# Altium PCB DASH_V_3.PcbDoc
Units mm, origin at the board's own origin, x right, y up, seen from the top; angles counter-clockwise.
Board outline 91 x 62 mm, 2 copper layers (Top Layer, Bottom Layer); 94 components, 86 nets, 304 pads, 58 vias.
Unrouted connection lines stored in the file: 1.
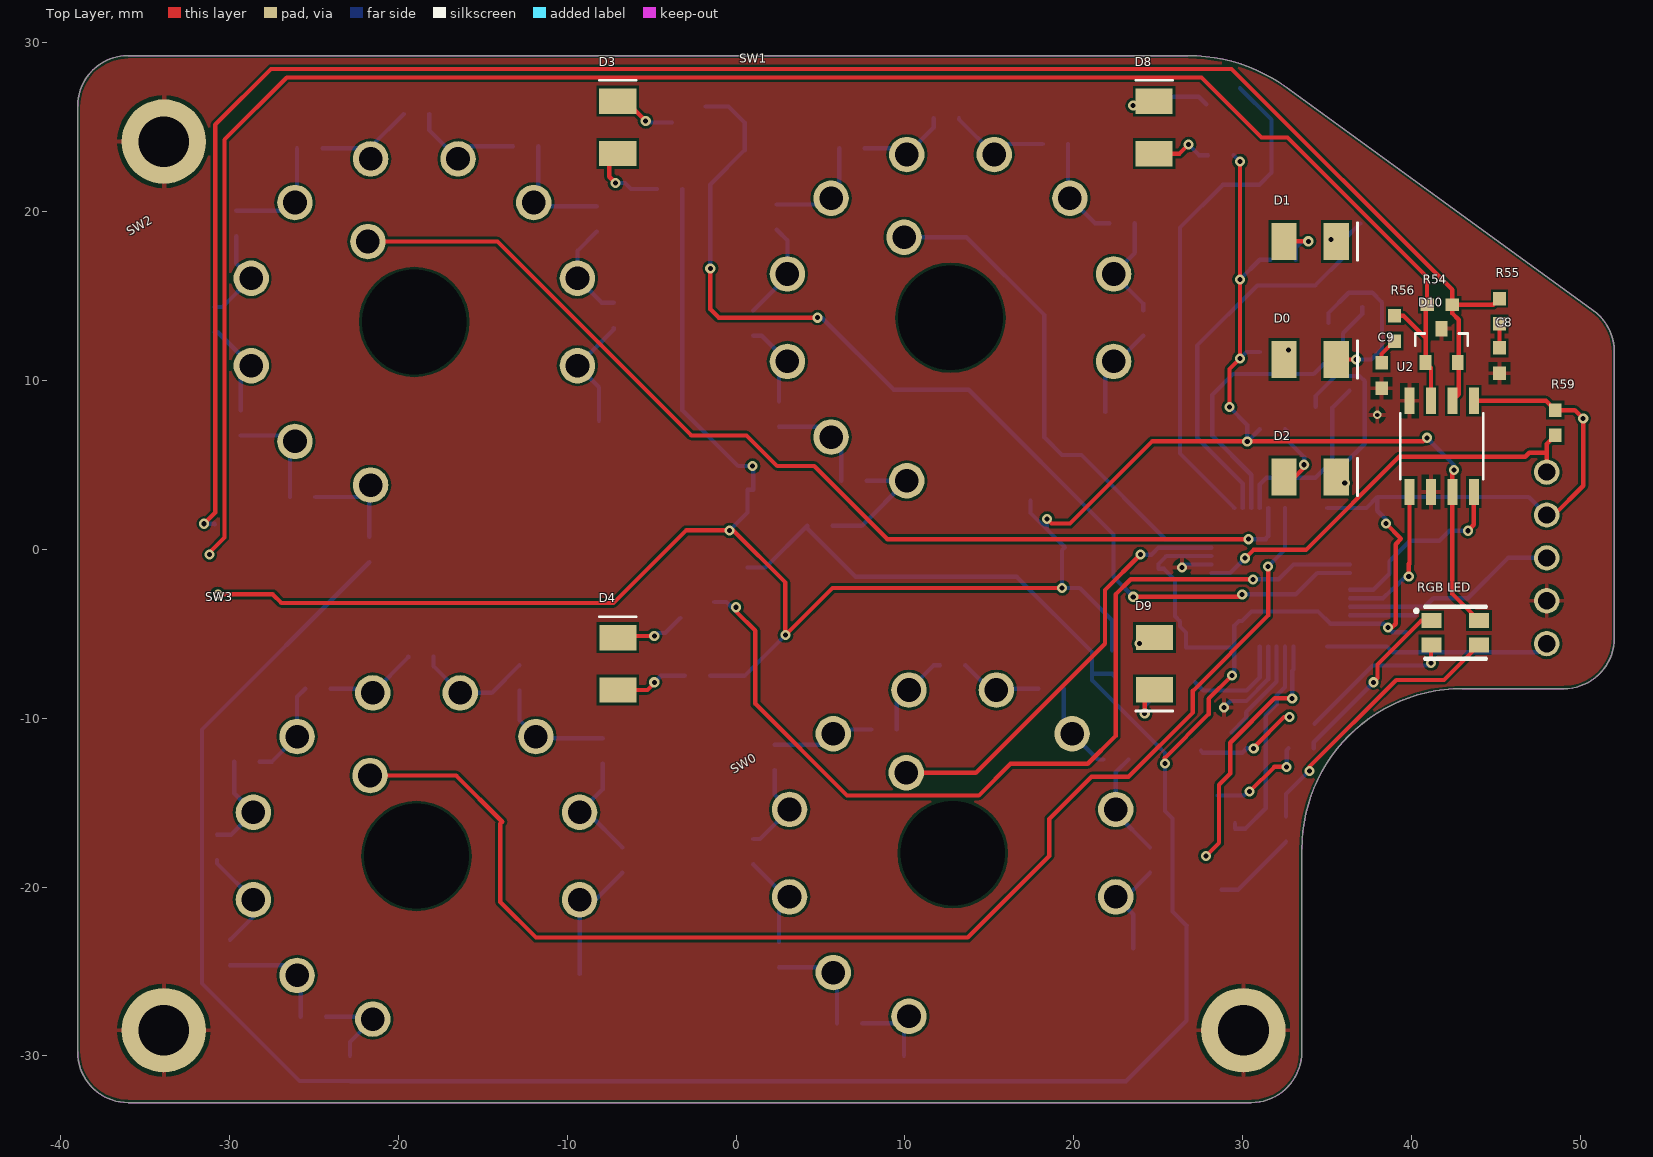
[diagram p0: Top Layer view]
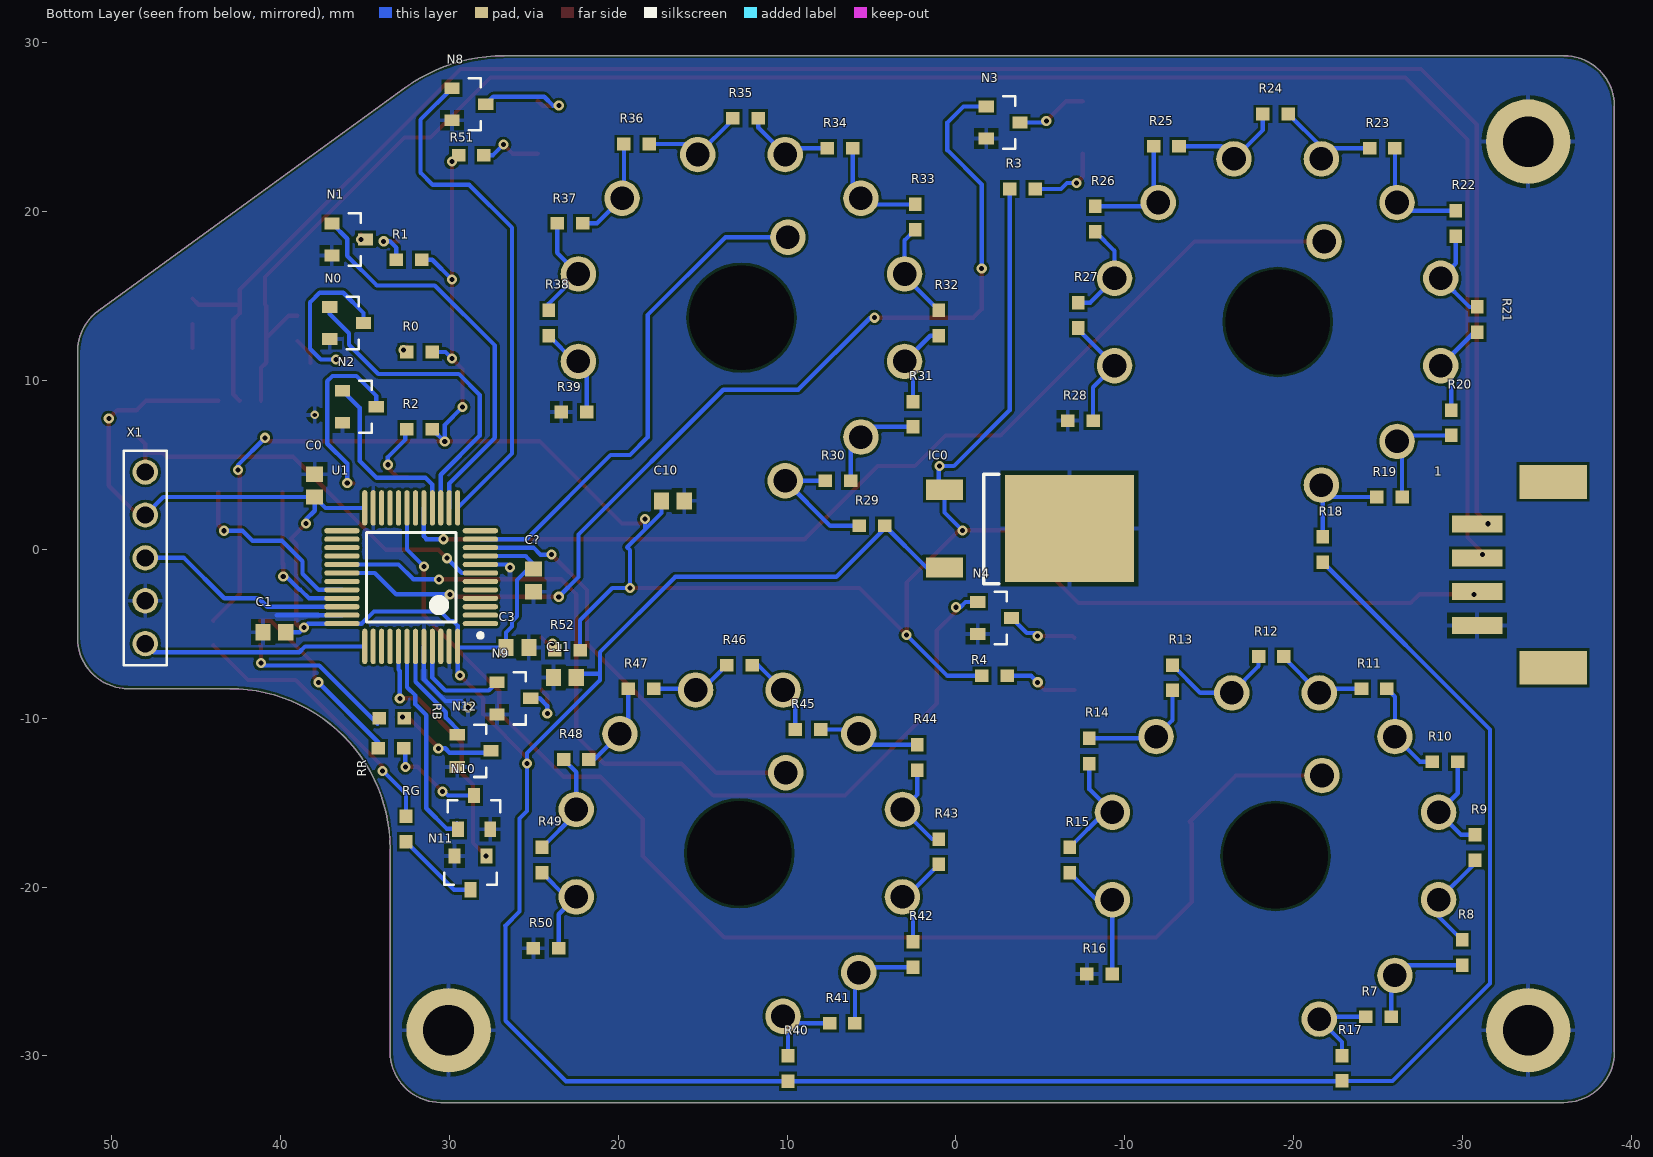
[diagram p1: Bottom Layer view, seen from below]
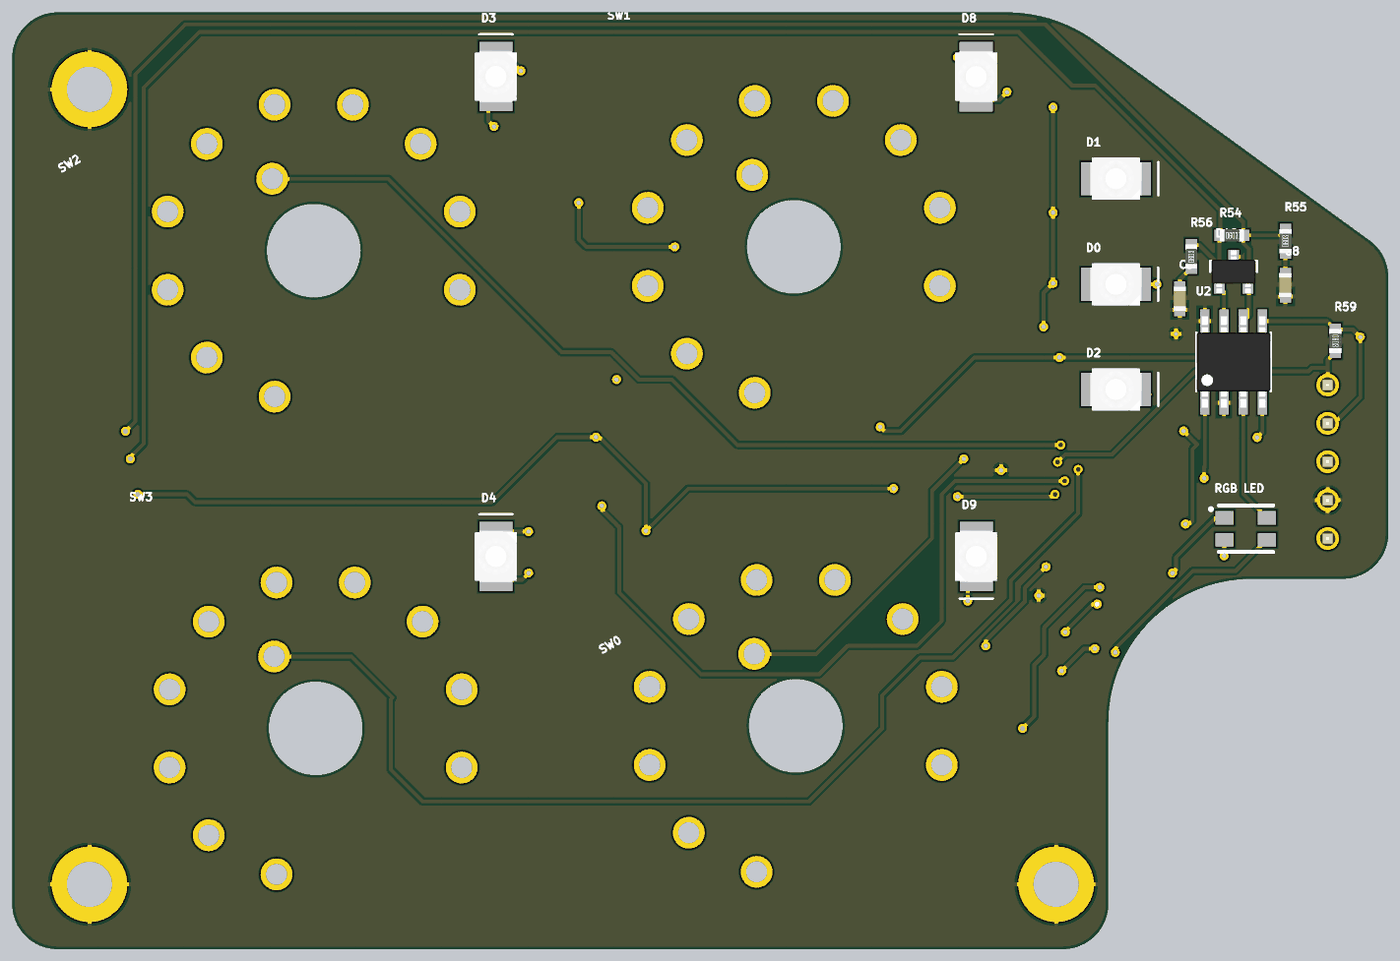
[diagram p2: 3D render of the assembled board from above, using the file's embedded part models]
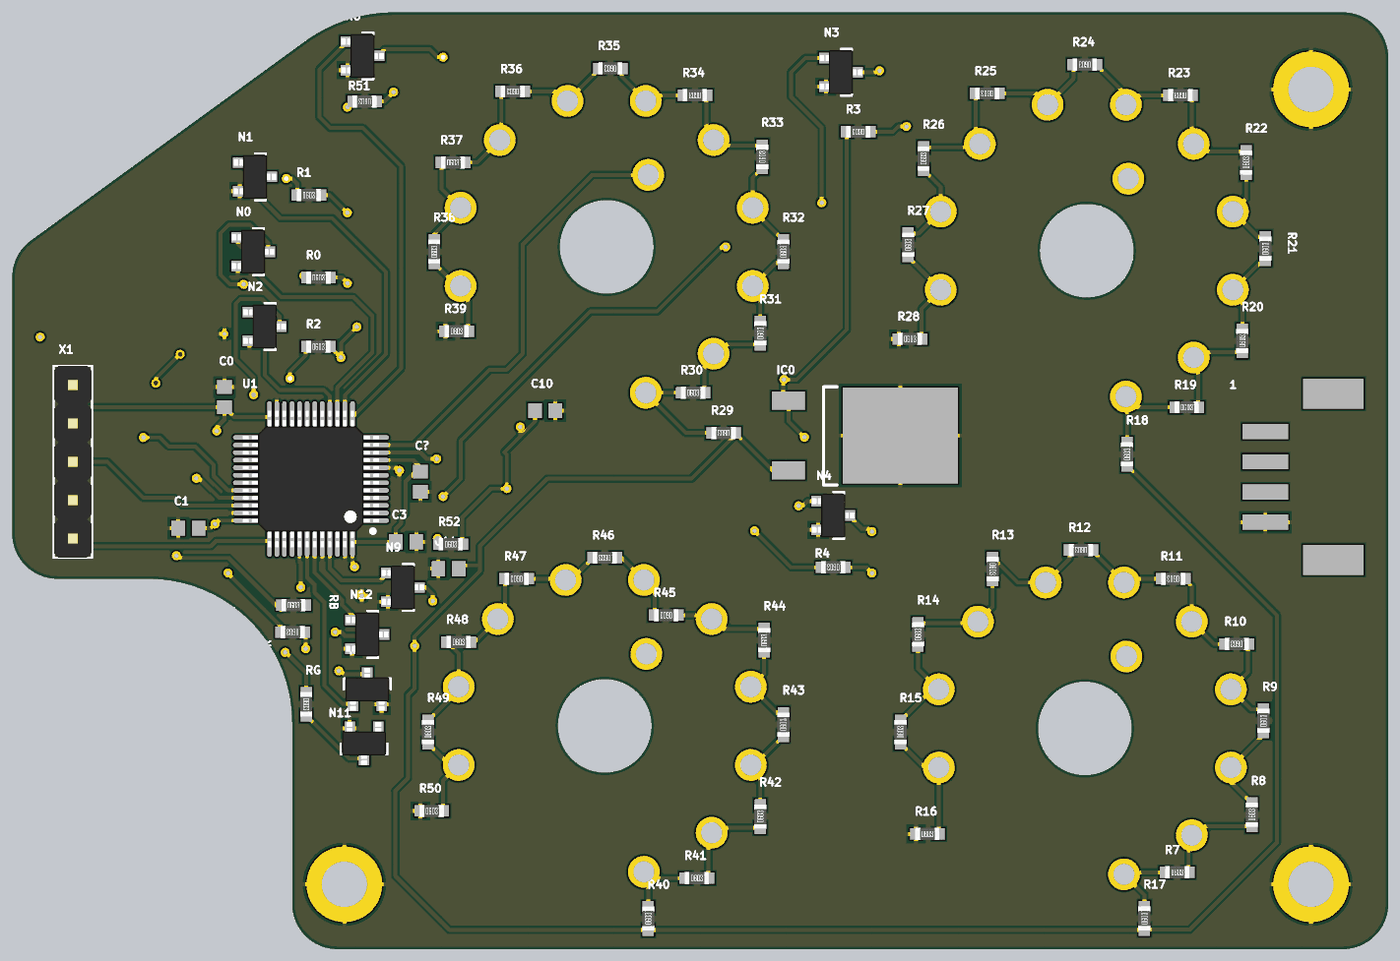
[diagram p3: 3D render of the assembled board from below, using the file's embedded part models]

## Layer stack, top to bottom
Top Solder: solder mask 0.0102, Solder Resist, Dk 3.5
Top Layer: signal copper 0.0356
Dielectric 1: dielectric 0.32, FR-4, Dk 4.8
Bottom Layer: signal copper 0.0356
Bottom Solder: solder mask 0.0102, Solder Resist, Dk 3.5

## Board outline
-38.989,-29.766 ccw(c-35.989,-29.766) -35.989,-32.766 30.499,-32.766 ccw(c30.499,-29.766) 33.499,-29.766 33.499,-17.766 cw(c43.011,-17.766) 43.011,-8.254 49.011,-8.254 ccw(c49.011,-5.254) 52.011,-5.254 52.011,11.706 ccw(c49.011,11.706) 50.776,14.133 32.641,27.321 ccw(c26.759,19.234) 26.759,29.234 -35.989,29.234 ccw(c-35.989,26.234) -38.989,26.234

## Design rules (kind name [scope] priority, off if disabled: settings)
Clearance [All] p1: gap=0.152 ignorepadtopadclearanceinfootprint=FALSE
ComponentClearance [All] p1: gap=0.254 collisioncheckmode=3 verticalgap=0 showdistances=FALSE
PolygonConnect [All] p1: connectstyle=Relief reliefconductorwidth=0.254 reliefentries=4 polygonreliefangle="90 Angle" airgapwidth=0.254
RoutingVias [All] p1: holewidth=15 width=12.7 viastyle="Through Hole" minholewidth=0.3 minwidth=0.6 maxholewidth=0.3 maxwidth=0.6
SolderMaskExpansion [All] p1: expansion=0.102
Width [All] p1: maxlimit=0.254 minlimit=0.254 preferedwidth=0.254
29 further rules are at their usual default settings.

## Classes and differential pairs
component class DASH_V_3_STM_CAN: 1 C0 C1 C3 C8 C9 C? D10 R54 R55 R56 R59 U1 U2 X1
component class DASH_V_3_POTS: R7 R8 R9 R10 R11 R12 R13 R14 R15 R16 R17 R18 R19 R20 R21 R22 R23 R24 R25 R26 R27 R28 R29 R30 R31 R32 R33 R34 R35 R36 R37 R38 R39 R40 R41 R42 R43 R44 R45 R46 R47 R48 R49 R50 SW0 SW1 SW2 SW3
component class DASH_V_3_LEDS_POWER: C10 C11 D0 D1 D2 D3 D4 D8 D9 IC0 N0 N1 N2 N3 N4 N8 N9 N11 N12 R0 R1 R2 R3 R4 R51 R52 RB RG "RGB LED" RR

## Components (designator, comment, footprint, x,y, rotation, side; value= is the part's Value field where it differs from the comment)
1 "Molex 505575-04 4 Position 2.00mm pitch connector wire to board connector Datasheet" 505575-04 -31.361,-1.508 r270 bottom
C0 ".1uf" CAPC1608X87X35NL15T15 37.973,3.77 r270 bottom
C1 ".1uf" CAPC1608X87X35NL15T15 40.359,-4.909 r180 bottom
C3 ".1uf" CAPC1608X87X35NL15T15 25.966,-5.809 r0 bottom
C8 "560p" CAP-0603 45.212,11.176 r90 top
C9 "560p" CAP-0603 38.227,10.287 r90 top
C10 ".33uf" CAPC1608X87X35NL15T15 16.764,2.872 r0 bottom
C11 ".1uf" CAPC1608X87X35NL15T15 23.154,-7.588 r180 bottom
C? ".1uf" CAPC1608X87X35NL15T15 25.019,-1.833 r90 bottom
D0 "LED_XZFBB45S" LED_XZFBB45S 34,11.238 r0 top
D1 "LED_XZFBB45S" LED_XZFBB45S 34,18.229 r0 top
D2 "LED_XZFBB45S" LED_XZFBB45S 34,4.281 r0 top
D3 "LED_XZFBB45S" LED_XZFBB45S -7.002,24.988 r90 top
D4 "LED_XZFBB45S" LED_XZFBB45S -7.001,-6.78 r90 top
D8 "LED_XZFBB45S" LED_XZFBB45S 24.759,24.982 r90 top
D9 "LED_XZFBB45S" LED_XZFBB45S 24.772,-6.775 r270 top
D10 "DIODE-SOT23_PESD1CAN" SOT23 41.783,12.065 r0 top
IC0 "LDO-TO252_L78" TO252 -6.731,1.249 r270 bottom
N0 "NMOS-SOT23" SOT23 36.084,13.396 r270 bottom
N1 "NMOS-SOT23" SOT23 35.957,18.349 r270 bottom
N2 "NMOS-SOT23" SOT23 35.322,8.443 r270 bottom
N3 "NMOS-SOT23" SOT23 -2.794,25.273 r270 bottom
N4 "NMOS-SOT23" SOT23 -2.286,-4.064 r270 bottom
N8 "NMOS-SOT23" SOT23 28.845,26.355 r270 bottom
N9 "NMOS-SOT23" SOT23 26.178,-8.824 r270 bottom
N10 "NMOS-SOT23" SOT23 28.53,-15.573 r180 bottom
N11 "NMOS-SOT23" SOT23 28.748,-19.158 r0 bottom
N12 "NMOS-SOT23" SOT23 28.534,-11.933 r270 bottom
R0 "RES 330" RES-0603 31.758,11.684 r180 bottom
R1 "RES 330" RES-0603 32.397,17.145 r180 bottom
R2 "RES 330" RES-0603 31.762,7.112 r180 bottom
R3 "RES 330" RES-0603 -3.937,21.336 r0 bottom
R4 "RES 330" RES-0603 -2.286,-7.493 r0 bottom
R7 "10K" RES-0603 -25.031,-27.686 r180 bottom
R8 "10K" RES-0603 -29.972,-23.876 r90 bottom
R9 "10K" RES-0603 -30.734,-17.653 r90 bottom
R10 "10K" RES-0603 -28.963,-12.573 r0 bottom
R11 "10K" RES-0603 -24.765,-8.255 r0 bottom
R12 "10K" RES-0603 -18.669,-6.35 r0 bottom
R13 "10K" RES-0603 -12.827,-7.608 r270 bottom
R14 "10K" RES-0603 -7.891,-11.938 r90 bottom
R15 "10K" RES-0603 -6.731,-18.403 r90 bottom
R16 "10K" RES-0603 -8.509,-25.146 r180 bottom
R17 "1K" RES-0603 -22.86,-30.734 r90 bottom
R18 "1K" RES-0603 -21.717,-0.012 r90 bottom
R19 "10K" RES-0603 -25.666,3.095 r180 bottom
R20 "10K" RES-0603 -29.337,7.493 r90 bottom
R21 "10K" RES-0603 -30.861,13.601 r90 bottom
R22 "10K" RES-0603 -29.591,19.292 r90 bottom
R23 "10K" RES-0603 -25.244,23.749 r0 bottom
R24 "10K" RES-0603 -18.923,25.781 r0 bottom
R25 "10K" RES-0603 -12.458,23.876 r0 bottom
R26 "10K" RES-0603 -8.255,19.558 r90 bottom
R27 "10K" RES-0603 -7.239,13.855 r90 bottom
R28 "10K" RES-0603 -7.366,7.62 r180 bottom
R29 "1K" RES-0603 4.965,1.397 r0 bottom
R30 "10K" RES-0603 6.985,4.064 r180 bottom
R31 "10K" RES-0603 2.54,8.001 r90 bottom
R32 "10K" RES-0603 1.016,13.396 r90 bottom
R33 "10K" RES-0603 2.413,19.673 r90 bottom
R34 "10K" RES-0603 6.858,23.749 r0 bottom
R35 "10K" RES-0603 12.458,25.527 r0 bottom
R36 "10K" RES-0603 18.911,24.003 r0 bottom
R37 "10K" RES-0603 22.86,19.304 r180 bottom
R38 "10K" RES-0603 24.106,13.396 r90 bottom
R39 "10K" RES-0603 22.618,8.128 r180 bottom
R40 "1K" RES-0603 9.95,-30.746 r90 bottom
R41 "10K" RES-0603 6.731,-28.067 r180 bottom
R42 "10K" RES-0603 2.54,-23.991 r90 bottom
R43 "10K" RES-0603 1.016,-17.907 r90 bottom
R44 "10K" RES-0603 2.286,-12.319 r90 bottom
R45 "10K" RES-0603 8.763,-10.668 r0 bottom
R46 "10K" RES-0603 12.827,-6.858 r0 bottom
R47 "10K" RES-0603 18.657,-8.255 r0 bottom
R48 "10K" RES-0603 22.486,-12.446 r180 bottom
R49 "10K" RES-0603 24.511,-18.403 r90 bottom
R50 "10K" RES-0603 24.269,-23.622 r180 bottom
R51 "RES 330" RES-0603 28.702,23.342 r0 bottom
R52 "RES 330" RES-0603 23.007,-5.969 r180 bottom
R54 "120" RES-0603 41.668,14.478 r0 top
R55 "100" RES-0603 45.212,14.097 r90 top
R56 "100" RES-0603 38.989,13.081 r90 top
R59 "10k" RES-0603 48.514,7.493 r270 top
RB "85" RES-0603 33.409,-9.997 r180 bottom
RG "90" RES-0603 32.567,-16.564 r270 bottom
"RGB LED" "AAA3528LSEEZGKQBKS" AAA3528 42.588,-4.948 r180 top
RR "140" RES-0603 33.464,-11.785 r0 bottom
SW0 "CURRENT" SPARKFUN-ELECTROMECHANICAL_ROTARY_SWITCH_1X10_KIT 12.827,-17.993 r210 top
SW1 "CUSTOM" SPARKFUN-ELECTROMECHANICAL_ROTARY_SWITCH_1X10_KIT 12.7,13.716 r210 top
SW2 "TC" SPARKFUN-ELECTROMECHANICAL_ROTARY_SWITCH_1X10_KIT -19.05,13.462 r210 top
SW3 "DRS" SPARKFUN-ELECTROMECHANICAL_ROTARY_SWITCH_1X10_KIT -18.923,-18.161 r210 top
U1 "IC-LQFP48_STM32F103C8T6" STM-LQFP48_M 32.258,-1.651 r0 bottom
U2 "IC-SOIC8_MCP2562" SOIC8 41.783,6.096 r0 top
X1 "Molex - Micro-Fit 3.0 Series connector,  3.00mm (0.118\") pitch header, 5 positions." POS5_254MM_MALE 48.006,-0.508 r90 bottom

## Footprints (in the part's own frame and the unit in brackets; to place one, negate y for a bottom-side part, rotate by r counter-clockwise, add the part's x,y. Pads: shape width x height; smd on the part's side, far side on the other; paste and mask are expansions set on the pad)
505575-04 [mm]
  rect 1x3 smd: 1(-3,-0.5) 2(-1,-0.5) 3(1,-0.5) 4(3,-0.5)
  rect 2x4 smd: P$3(-5.5,4) P$4(5.5,4)
AAA3528 [mm]
  rect 1.2x0.9 smd: 1(1.4,-0.725) 2(-1.4,-0.725) 3(-1.4,0.725) 4(1.4,0.725)
  silkscreen extent -1.82,-1.54 2.37,1.53
CAP-0603 [mm]
  rect 0.8x0.75 smd: 1(-0.75,0) 2(0.75,0)
  body extent -0.8,-0.4 0.8,0.42, height 0.81
CAPC1608X87X35NL15T15 [mm] "Chip Capacitor, 2-Leads, Body 1.60x0.80mm, IPC Medium Density"
  rect 0.9x1 smd: 1(-0.675,0) 2(0.675,0)
  body extent -0.87,-0.48 0.87,0.47, height 0.87
LED_XZFBB45S [mm]
  rect 1.5x2.2 smd: A(-1.55,0) K(1.55,0)
  silkscreen extent 2.8,-1.1 2.8,1.1, body extent -1.75,-1.4 1.75,1.4, height 1.9
POS5_254MM_MALE [mm]
  round 1.5 hole 1.02: P$1(-5.08,0) P$2(-2.54,0) P$3(0,0) P$4(2.54,0) P$5(5.08,0)
  silkscreen extent -6.35,-1.27 6.35,1.27, body extent -6.35,-1.24 6.35,1.25, height 8.54
RES-0603 [mm]
  rect 0.8x0.75 smd: 1(-0.75,0) 2(0.75,0)
  body extent -0.8,-0.4 0.8,0.4, height 0.44
SOIC8 [mm]
  rect 0.6x1.55 smd: 1(-1.905,-2.7) 2(-0.635,-2.7) 3(0.635,-2.7) 4(1.905,-2.7) 5(1.905,2.7) 6(0.635,2.7) 7(-0.635,2.7) 8(-1.905,2.7)
  silkscreen extent -2.45,-1.95 2.45,1.95, body extent -2.45,-3.01 2.45,3.01, height 1.5
SOT23 [mm]
  rect 0.7x0.9 smd: 1(-0.95,-1) 2(0.95,-1) 3(0,1)
  silkscreen extent -1.55,0 1.55,0.71, body extent -1.45,-1.41 1.45,1.41, height 1.5
SPARKFUN-ELECTROMECHANICAL_ROTARY_SWITCH_1X10_KIT [mm]
  round 2.1 / inner round 1.524 / far side round 2.1 hole 1.4: 1(7.071,7.071) 2(9.659,2.588) 3(9.659,-2.588) 4(7.071,-7.071) 5(2.588,-9.659) 6(-2.588,-9.659) 7(-7.071,-7.071) 8(-9.659,-2.588) 9(-9.659,2.588) 10(-7.071,7.071) COMMON(0,-5.5)
STM-LQFP48_M [mm] "QFP, 48-Leads, Body 7x7mm, Pitch 0.5mm, IPC Low Density"
  oval 2.1x0.3 smd: 1(-4.1,2.75) 2(-4.1,2.25) 3(-4.1,1.75) 4(-4.1,1.25) 5(-4.1,0.75) 6(-4.1,0.25) 7(-4.1,-0.25) 8(-4.1,-0.75) 9(-4.1,-1.25) 10(-4.1,-1.75) 11(-4.1,-2.25) 12(-4.1,-2.75) 25(4.1,-2.75) 26(4.1,-2.25) 27(4.1,-1.75) 28(4.1,-1.25) 29(4.1,-0.75) 30(4.1,-0.25) 31(4.1,0.25) 32(4.1,0.75) 33(4.1,1.25) 34(4.1,1.75) 35(4.1,2.25) 36(4.1,2.75)
  oval 0.3x2.1 smd: 13(-2.75,-4.1) 14(-2.25,-4.1) 15(-1.75,-4.1) 16(-1.25,-4.1) 17(-0.75,-4.1) 18(-0.25,-4.1) 19(0.25,-4.1) 20(0.75,-4.1) 21(1.25,-4.1) 22(1.75,-4.1) 23(2.25,-4.1) 24(2.75,-4.1) 37(2.75,4.1) 38(2.25,4.1) 39(1.75,4.1) 40(1.25,4.1) 41(0.75,4.1) 42(0.25,4.1) 43(-0.25,4.1) 44(-0.75,4.1) 45(-1.25,4.1) 46(-1.75,4.1) 47(-2.25,4.1) 48(-2.75,4.1)
  silkscreen extent -4.22,-2.65 2.65,3.57, body extent -4.51,-4.51 4.51,4.51, height 1.55
TO252 [mm]
  rect 1.2x2.2 smd: 1(-2.279,-7.409) 3(2.321,-7.409)
  rect 6.35x7.62 smd: 2(0.021,-0.009)
  silkscreen extent -3.2,-5.09 3.3,-4.2, body extent -3.22,-7.29 3.28,1.41, height 2.3

## Part data
1: library part 505575-04, DeviceSetName=505575-04, GateName_1=G$1, LibraryName="MOLEX Micro-Lock", Package=505575-04, SymbolName_1=4POS
C0 C1 C3 C10 C11 C?: library part CMP-2006-03887-1, ".1 uf", Manufacturer=Kemet, Part Number=C0603C104J3RAC7867
C8 C9: library part CAP-0603
R0 R1 R2 R3 R4 R7 R8 R9 R10 R11 R12 R13 R14 R15 R16 R17 R18 R19 R20 R21 R22 R23 R24 R25 R26 R27 R28 R29 R30 R31 R32 R33 R34 R35 R36 R37 R38 R39 R40 R41 R42 R43 R44 R45 R46 R47 R48 R49 R50 R51 R52 R54 R55 R56 R59 RB RG RR: library part RES-0603
"RGB LED": "LED", Manufacturer_Name=Kingbright, Mouser Part Number=604-AAA3528LSEEZGKQB, Datasheet Link=https://componentsearchengine.com/Datasheets/1/AAA3528LSEEZGKQBKS.pdf, Manufacturer_Part_Number=AAA3528LSEEZGKQBKS, Mouser Price/Stock=https://www.mouser.com/Search/Refine.aspx?Keyword=604-AAA3528LSEEZGKQB
SW0 SW1 SW2 SW3: library part SPARKFUN-ELECTROMECHANICAL_SWITCH_ROTARY_1X10KIT, Package=SPARKFUN-ELECTROMECHANICAL_ROTARY_SWITCH_1X10_KIT, DeviceName=KIT, DeviceSetName=SPARKFUN-ELECTROMECHANICAL_SWITCH_ROTARY_1X10, GateName_1=G$1, LibraryName=Rotary_Switch_Potentiometer_v10, PROD_ID=SWCH-12120, SymbolName_1=SPARKFUN-ELECTROMECHANICAL_ROTARY-SWITCH-1X10
U1: I/Os (High Current)=37, Operating Frequency(F) (Processor speed) (MHz)=72, PartNumber=STM32F103C8T6, Supplier Part Number 1=497-6063-ND, Supply Voltage(Vcc) min (V)=2, A/D Converter="2x12-bit (10 Channel)", ComponentLink1Description="Manufacturer URL", ComponentLink1URL=http://www.st.com/web/en/home.html, ComponentLink2Description=Datasheet, ComponentLink2URL=http://www.st.com/st-web-ui/static/active/en/resource/technical/document/datasheet/CD00161566.pdf, ComponentLink3Description="Package Specification", ComponentLink3URL=http://www.st.com/st-web-ui/static/active/en/resource/technical/document/datasheet/DM00058181.pdf, Core="ARM Cortex-M3", DatasheetVersion="Rev. 16", FLASH Size (Prog) (kB)=64, Internal RAM Size (kB)=20, Mounting Technology="Surface Mount", PackageDescription="48-Pin Low Profile Quad Flat Package, 7 x 7 mm Body, 0.5 mm Pitch", PackageReference=LQFP48, PackageVersion="Rev. 6, 06/2013", Packing=Tray, Supplier 1=Digi-Key, Supplier 2=Farnell, Supplier 3=Newark, Supplier 4=Newark, Supplier 5=Mouser, Supplier Part Number 2=1447637, Supplier Part Number 3=59M2182, Supplier Part Number 4=57P1222, Supplier Part Number 5=511-STM32F103C8T6
X1: library part POS5_254MM_MALE, Package=43650-0524, DeviceName=43650-0524, DeviceSetName=HEADER_POS5_?, GateName_1=G$1, LibraryName="MOLEX Micro-Fit", SymbolName_1=HEADER_POS5

## Free pads (board coordinates)
  round 6 hole 6.2 unplated: 7(-19.05,13.462) 7(-18.923,-18.161) 7(12.7,13.716) 7(12.827,-17.993)
  round 5 hole 3 unplated: 8(-33.882,24.144) 9(30.046,-28.478) 10(-33.882,-28.478)

## Via types
v1: diameter 0.6, hole 0.3, Top Layer to Bottom Layer, 57 vias
v2: diameter 0.508, hole 0.254, Top Layer to Bottom Layer, 1 vias

## Nets (pads, with @x,y where several pads share a name; then routed paths per layer and width w, separated by ;. In a path a pad name is that pad's centre, name@x,y a point inside that pad or via, vN(x,y) a via of type N, cw(c..) or ccw(c..) an arc to the next point about the centre after c; other vN are vias at no path point)
+3.3V: C0.2 C1.2 C3.2 C11.2 C?.2 IC0.3 R17.1 R18.1 R29.1 R40.1 R59.1 U1.9 U1.24 U1.36 U1.48 U2.5 X1.P$4 | length 210.6
  Top Layer w0.254: v1(25.394,-12.691) 25.394,-12.35 27.985,-9.759 27.985,-8.854 v1(29.375,-7.465) ; v1(38.481,1.524) 39.382,0.623 39.064,0.305 39.064,-4.399 39.068,-4.403 38.84,-4.631 v1(38.599,-4.631) ; U2.5 47.961,8.796 R59.1 49.669,8.243 v1(50.165,7.747) 50.165,3.765 48.432,2.032 X1.P$4
  Bottom Layer w0.254: R18.1 -31.623,-10.668 -31.623,-25.714 -25.853,-31.484 R17.1 -22.848,-31.496 R40.1 23.09,-31.496 26.67,-27.916 26.67,-22.299 ; IC0.3 1.746,-1.072 R29.1 4.215,1.241 7.088,-1.632 16.626,-1.632 21.082,-6.088 21.082,-7.366 ; C11.2 22.257,-7.366 21.082,-7.366 ; 26.682,-22.286 25.842,-21.446 25.842,-15.941 25.4,-15.5 25.4,-12.065 21.082,-7.747 21.082,-7.366 ; U1.9 25.483,-0.401 25.019,-0.865 C?.2 25.337,-1.158 25.991,-1.812 25.991,-3.968 26.289,-4.266 26.289,-4.572 26.641,-4.924 C3.2 U1.48@29.45,-5.809 ; v1(29.375,-7.465) 29.508,-7.331 U1.48 29.508,-4.52 29.784,-4.244 29.965,-4.244 30.525,-3.683 34.466,-3.683 35.184,-4.401 U1.36 38.37,-4.401 v1(38.599,-4.631) 38.878,-4.909 C1.2 ; U1.24 37.327,2.449 C0.2 ; v1(38.481,1.524) 38.481,1.778 37.973,2.286 C0.2 ; X1.P$4 46.943,3.095 C0.2
+5: 1.3 "RGB LED.2" C10.2 IC0.1 R0.2 R1.2 R2.2 R3.2 R4.2 R51.2 R52.2 U2.3 | length 157.8
  Top Layer w0.254: v1(-30.686,-2.667) -27.432,-2.667 -26.924,-3.175 -7.254,-3.175 -2.957,1.122 v1(-0.381,1.122) -0.166,1.122 2.921,-1.965 v1(2.921,-5.08) 5.715,-2.286 v1(19.304,-2.286) ; v1(18.415,1.794) 18.685,1.524 19.771,1.524 24.638,6.391 v1(30.271,6.391) 40.693,6.391 v1(40.906,6.604) ; v1(29.218,8.418) 29.218,10.676 v1(29.845,11.303) v1(29.845,15.978) v1(29.845,22.961) ; v1(42.514,4.699) 42.418,4.603 U2.3 42.418,-2.652 43.988,-4.223
  Bottom Layer w0.254: R3.2 -3.187,8.243 0.124,4.932 v1(0.975,4.932) 1.023,4.884 1.023,3.528 IC0.1 0.678,2.181 v1(-0.381,1.122) ; R4.2 0.508,-7.493 v1(2.921,-5.08) ; C10.2 17.439,2.155 18.415,1.179 ; v1(18.415,1.794) 18.415,1.179 ; R52.2 22.257,-5.62 22.263,-5.626 22.263,-4.198 20.35,-2.286 v1(19.304,-2.286) 19.304,-0.05 19.474,0.12 18.415,1.179 ; v1(29.218,8.418) 30.271,7.365 v1(30.271,6.391) 30.291,6.391 R2.2 ; R51.2 29.464,23.342 v1(29.845,22.961) ; v1(29.845,11.303) 30.226,11.684 R0.2 ; v1(29.845,15.978) 31.012,17.145 R1.2 ; v1(40.906,6.604) 42.514,4.996 v1(42.514,4.699)
BMS_LED_ON: N1.1 U1.14 | length 24
  Bottom Layer w0.254: U1.14 30.008,3.901 27.305,6.604 27.305,12.065 30.861,15.621 34.29,15.621 36.047,17.378 36.047,18.389 N1.1
BSPD_LED_ON: N2.1 U1.16 | length 10.8
  Bottom Layer w0.254: U1.16 31.008,3.838 31.408,4.238 34.314,4.238 35.306,5.23 35.306,8.377 N2.1
CAN_H: 1.2 D10.1 R54.1 R56.2 U2.7 | length 112.5
  Top Layer w0.254: v1(-31.177,-0.318) -31.177,-0.189 -30.287,0.701 -30.287,24.26 -26.607,27.94 27.559,27.94 31.115,24.384 32.658,24.384 40.918,16.124 R54.1 40.846,14.406 40.846,12.506 ; R56.2 39.521,13.831 40.846,12.506 ; U2.7 41.148,10.747 40.846,11.049 40.846,12.506
CAN_L: 1.1 D10.2 R54.2 R55.2 U2.6 | length 114.5
  Top Layer w0.254: v1(-31.503,1.512) -30.837,2.177 -30.837,25.148 -27.538,28.448 29.337,28.448 42.418,15.367 R54.2 ; U2.6 42.799,9.177 42.799,13.589 42.418,13.97 R54.2 ; R55.2 44.843,14.478 R54.2
  Bottom Layer w0.254: 1.1@-31.425,1.589 v1(-31.503,1.512) -30.881,1.512 1.1
CAN_RX: U1.32 U2.4 | length 11.3
  Top Layer w0.254: v1(43.335,1.099) 43.688,1.452 U2.4
  Bottom Layer w0.254: U1.32 37.734,-2.401 38.693,-1.443 38.693,-0.711 39.912,0.508 41.656,0.508 42.247,1.099 v1(43.335,1.099)
CAN_TX: U1.33 U2.1 | length 9.1
  Top Layer w0.254: v1(39.836,-1.602) 39.836,-0.847 39.878,-0.889 U2.1
  Bottom Layer w0.254: U1.33 38.31,-2.901 38.81,-2.401 38.856,-2.401 39.655,-1.602 v1(39.836,-1.602)
CUR_LED: N8.1 U1.13 | length 30.5
  Bottom Layer w0.254: U1.13 26.289,5.668 26.289,19.05 28.829,21.59 30.988,21.59 31.705,22.307 31.705,25.445 N8.1
CURRENT_VAL: SW0.COMMON U1.10 | length 25.5
  Top Layer w0.254: SW0.COMMON 14.202,-13.23 21.844,-5.588 21.844,-2.413 v1(23.939,-0.318)
  Bottom Layer w0.254: v1(23.939,-0.318) 24.602,-0.318 25.019,0.099 U1.10
CUST_LED: N9.1 U1.45 | length 6.2
  Bottom Layer w0.254: N9.1 27.662,-8.358 30.238,-8.358 31.008,-7.588 U1.45
"CUSTOM VAL": SW1.COMMON U1.11 | length 29.9
  Bottom Layer w0.254: SW1.COMMON 13.647,18.479 18.257,13.869 18.257,6.635 19.304,5.588 20.447,5.588 25.436,0.599 U1.11
DRS_LED: N4.1 U1.29 | length 55.6
  Top Layer w0.254: v1(0,-3.429) 0,-3.683 1.143,-4.826 1.143,-9.144 6.575,-14.576 14.38,-14.576 16.256,-12.7 20.828,-12.7 22.479,-11.049 22.479,-2.667 23.368,-1.778 v1(30.607,-1.778)
  Bottom Layer w0.254: N4.1 -0.569,-3.114 -0.254,-3.429 v1(0,-3.429) ; v1(30.607,-1.778) 32.131,-1.778 33.008,-0.901 U1.29
DRS_VAL: SW3.COMMON U1.19 | length 76.8
  Top Layer w0.254: SW3.COMMON -16.575,-13.398 -13.844,-16.129 -13.96,-16.245 -13.96,-20.883 -11.852,-22.992 13.72,-22.992 18.55,-18.161 18.55,-15.97 21.05,-13.47 23.241,-13.47 27.051,-9.66 27.051,-8.382 31.508,-3.925 v1(31.508,-1.016)
  Bottom Layer w0.254: v1(31.508,-1.016) 32.508,-0.016 U1.19
GND: 1.4 C0.1 C1.1 C3.1 C8.1 C9.1 C10.1 C11.1 C?.1 D10.3 IC0.2 N0.2 N1.2 N2.2 N3.2 N4.2 N8.2 N9.2 N10.2 N11.2 N12.2 pad.8 pad.9 R16.1 R28.1 R39.1 R50.1 U1.8 U1.23 U1.35 U1.44 U1.47 U2.2 U2.8 X1.P$2 | length 10.9
  Bottom Layer w0.254: v1(26.406,-1.077) 26.582,-0.901 U1.8 ; v1(28.895,-9.371) 29.284,-8.982 30.223,-8.982 31.508,-7.697 U1.44 ; U1.35 40.224,-3.901
  other v2: 37.973,7.957
IMD_LED_ON: N0.1 U1.15 | length 19.3
  Bottom Layer w0.254: U1.15 30.508,4.417 28.194,6.731 28.194,9.144 29.437,10.387 34.214,10.387 35.941,12.114 35.941,12.791 37.084,13.934 N0.1
NetC8_2: C8.2 R55.1 | length 1.4
  Top Layer w0.254: C8.2 R55.1
NetC9_2: C9.2 R56.1 | length 1.6
  Top Layer w0.254: C9.2 38.227,11.569 R56.1
NetD0_A: D0.A R0.1 | length 0.9
  Top Layer w0.254: D0.A@32.502,12.014 v1(32.715,11.802)
  Bottom Layer w0.254: R0.1@32.573,11.931 32.664,11.84 R0.1 32.502,11.69 32.614,11.802 v1(32.715,11.802)
NetD0_K: D0.K N0.3 | length 9.8
  Top Layer w0.254: D0.K@35.971,11.238 v1(36.707,11.238)
  Bottom Layer w0.254: N0.3 35.084,13.991 36.284,15.191 37.68,15.191 38.248,14.622 38.248,11.877 37.61,11.238 v1(36.707,11.238)
NetD1_A: D1.A R1.1 | length 2.5
  Top Layer w0.254: D1.A@33.01,18.229 33.074,18.293 33.129,18.238 v1(33.887,18.238)
  Bottom Layer w0.254: R1.1 33.147,17.864 33.521,18.238 v1(33.887,18.238)
NetD1_K: D1.K N1.3 | length 0.5
  Top Layer w0.254: v1(35.226,18.349) D1.K@35.226,18.622
  Bottom Layer w0.254: N1.3 v1(35.226,18.349)
NetD2_A: D2.A R2.1 | length 4.4
  Top Layer w0.254: D2.A@32.462,4.281 33.088,4.281 33.816,5.009 v1(33.64,5.009)
  Bottom Layer w0.254: R2.1 32.605,7.019 32.605,6.505 33.64,5.47 v1(33.64,5.009)
NetD2_K: D2.K N2.3 | length 11
  Top Layer w0.254: D2.K@35.689,3.9 35.686,3.903 35.712,3.929 v1(36.047,3.929)
  Bottom Layer w0.254: N2.3 34.322,9.075 35.505,10.259 36.925,10.259 37.225,9.958 37.225,6.254 36.047,5.075 v1(36.047,3.929)
NetD3_A: D3.A R3.1 | length 4.5
  Top Layer w0.254: D3.A@-7.51,23.438 -7.51,22.067 v1(-7.129,21.686)
  Bottom Layer w0.254: v1(-7.129,21.686) -6.573,21.686 -6.223,21.336 R3.1
NetD3_K: D3.K N3.3 | length 4.2
  Top Layer w0.254: D3.K@-7.51,26.538 D3.K -6.52,26.538 v1(-5.351,25.369)
  Bottom Layer w0.254: v1(-5.351,25.369) -5.255,25.273 N3.3
NetD4_A: D4.A R4.1 | length 4.4
  Top Layer w0.254: D4.A -5.249,-8.33 -4.793,-7.874 v1(-4.842,-7.874)
  Bottom Layer w0.254: v1(-4.842,-7.874) -4.46,-7.493 R4.1
NetD4_K: D4.K N4.3 | length 4.2
  Top Layer w0.254: D4.K -6.9,-5.129 v1(-4.842,-5.129)
  Bottom Layer w0.254: v1(-4.842,-5.129) -4.666,-4.953 -4.191,-4.953 -3.302,-4.064 N4.3
NetD8_A: D8.A R51.1 | length 3.7
  Top Layer w0.254: D8.A 26.265,23.432 v1(26.795,23.962)
  Bottom Layer w0.254: v1(26.795,23.962) 27.415,23.342 R51.1
NetD8_K: D8.K N8.3 | length 6.2
  Top Layer w0.254: v1@23.579,26.214 v1(23.519,26.274) 24.501,26.274 D8.K
  Bottom Layer w0.254: v1(23.519,26.274) 23.861,26.274 24.384,26.797 27.403,26.797 N8.3
NetD9_A: D9.A R52.1 | length 0.8
  Top Layer w0.254: v1(23.891,-5.588) 24.184,-5.588 D9.A@24.548,-5.225
NetD9_K: D9.K N9.3 | length 3.2
  Top Layer w0.254: v1(24.199,-9.731) 24.199,-8.674 D9.K@24.548,-8.325
  Bottom Layer w0.254: v1(24.199,-9.731) 24.199,-9.27 24.644,-8.824 N9.3
NetN10_3: N10.3 RR.1 | length 5.9
  Top Layer w0.254: v1(30.41,-14.35) 31.877,-12.883 v1(32.605,-12.883)
  Bottom Layer w0.254: N10.3 30.082,-14.573 30.304,-14.35 v1(30.41,-14.35) ; v1(32.605,-12.883) 32.605,-11.894 RR.1
NetN11_3: N11.3 RG.2 | length 5
  Bottom Layer w0.254: N11.3 29.723,-20.158 RG.2
NetN12_3: N12.3 RB.2 | length 6.3
  Top Layer w0.254: v1(30.654,-11.785) 30.654,-11.728 32.45,-9.932 v1(32.765,-9.932)
  Bottom Layer w0.254: N12.3 27.643,-12.042 29.99,-12.042 30.247,-11.785 v1(30.654,-11.785) ; RB.2@32.765,-10.006 v1(32.765,-9.932)
NetR7_1: R7.1 R17.2 SW3.1 | length 5.5
  Bottom Layer w0.254: R7.1 -21.646,-27.686 SW3.1 -22.86,-29.169 R17.2
NetR7_2: R7.2 R8.1 SW3.2 | length 6.8
  Bottom Layer w0.254: R8.1 -26.6,-24.626 SW3.2 -25.781,-25.445 R7.2
NetR8_2: R8.2 R9.1 SW3.3 | length 6.2
  Bottom Layer w0.254: R9.1 -30.734,-18.598 SW3.3 -28.582,-21.736 R8.2
NetR9_2: R9.2 R10.1 SW3.4 | length 6.2
  Bottom Layer w0.254: R9.2 -29.913,-16.903 SW3.4 -29.713,-14.442 R10.1
NetR10_2: R10.2 R11.1 SW3.5 | length 5.9
  Bottom Layer w0.254: R10.2 -27.477,-12.573 SW3.5 -25.994,-8.734 R11.1
NetR11_2: R11.2 R12.1 SW3.6 | length 5.6
  Bottom Layer w0.254: R11.2 -21.758,-8.255 SW3.6 -19.419,-6.409 R12.1
NetR12_2: R12.2 R13.1 SW3.7 | length 7
  Bottom Layer w0.254: R12.2 -17.919,-6.917 SW3.7 -14.471,-8.502 R13.1
NetR13_2: R13.2 R14.2 SW3.8 | length 7.1
  Bottom Layer w0.254: R13.2 -12.827,-10.115 SW3.8 -11.754,-11.188 R14.2
NetR14_1: R14.1 R15.2 SW3.9 | length 6.8
  Bottom Layer w0.254: R14.1 -7.891,-14.2 SW3.9 -8.811,-15.573 R15.2
NetR15_1: R15.1 R16.2 SW3.10 | length 7.6
  Bottom Layer w0.254: R16.2 -9.264,-25.141 SW3.10 -8.327,-20.749 R15.1
NetR18_2: R18.2 R19.1 SW2.1 | length 6.6
  Bottom Layer w0.254: R19.1 -22.346,3.095 SW2.1@-21.717,3.724 ; R18.2 SW2.1@-21.717,3.724 ; SW2.1 SW2.1@-21.717,3.724
NetR19_2: R19.2 R20.1 SW2.2 | length 6.8
  Bottom Layer w0.254: R20.1 -26.473,6.743 SW2.2 -26.416,6.096 R19.2
NetR20_2: R20.2 R21.1 SW2.3 | length 5.9
  Bottom Layer w0.254: R21.1 -30.687,12.851 SW2.3 -29.337,10.246 R20.2
NetR21_2: R21.2 R22.1 SW2.4 | length 5.7
  Bottom Layer w0.254: R21.2 -30.409,14.351 SW2.4 -29.591,16.932 R22.1
NetR22_2: R22.2 R23.1 SW2.5 | length 6.9
  Bottom Layer w0.254: R22.2 -26.612,20.042 SW2.5 -25.994,20.66 R23.1
NetR23_2: R23.2 R24.1 SW2.6 | length 6.6
  Bottom Layer w0.254: R23.2 -22.266,23.749 SW2.6 -21.638,23.816 R24.1
NetR24_2: R24.2 R25.1 SW2.7 | length 6.9
  Bottom Layer w0.254: R24.2 -18.173,24.833 SW2.7 -15.707,23.876 R25.1
NetR25_2: R25.2 R26.2 SW2.8 | length 7.3
  Bottom Layer w0.254: R25.2 -11.708,20.804 SW2.8 -11.754,20.308 R26.2
NetR26_1: R26.1 R27.2 SW2.9 | length 6
  Bottom Layer w0.254: R26.1 -9.391,17.672 SW2.9 -7.945,14.605 R27.2
NetR27_1: R27.1 R28.2 SW2.10 | length 6.9
  Bottom Layer w0.254: R28.2 -8.116,9.599 SW2.10 -7.239,13.025 R27.1
NetR29_2: R29.2 R30.1 SW1.1 | length 7.9
  Bottom Layer w0.254: R29.2 7.452,1.397 SW1.1 10.104,4.064 R30.1
NetR30_2: R30.2 R31.1 SW1.2 | length 6.2
  Bottom Layer w0.254: R31.1 5.023,7.251 SW1.2 6.235,6.039 R30.2
NetR31_2: R31.2 R32.1 SW1.3 | length 5.2
  Bottom Layer w0.254: R32.1 1.522,12.646 SW1.3 2.54,10.627 R31.2
NetR32_2: R32.2 R33.1 SW1.4 | length 5.9
  Bottom Layer w0.254: R32.2 3.041,16.171 SW1.4 3.041,18.295 R33.1
NetR33_2: R33.2 R34.1 SW1.5 | length 6.5
  Bottom Layer w0.254: R33.2 5.265,20.423 SW1.5 6.108,21.266 R34.1
NetR34_2: R34.2 R35.1 SW1.6 | length 5.5
  Bottom Layer w0.254: R34.2 9.738,23.749 SW1.6 11.708,24.972 R35.1
NetR35_2: R35.2 R36.1 SW1.7 | length 6.1
  Bottom Layer w0.254: R35.2 13.208,25.456 SW1.7 15.916,24.003 R36.1
NetR36_2: R36.2 R37.2 SW1.8 | length 6.2
  Bottom Layer w0.254: R36.2 19.661,20.897 SW1.8 21.254,19.304 R37.2
NetR37_1: R37.1 R38.2 SW1.9 | length 6.4
  Bottom Layer w0.254: R37.1 23.61,17.555 SW1.9 24.106,14.558 R38.2
NetR38_1: R38.1 R39.2 SW1.10 | length 5.6
  Bottom Layer w0.254: R39.2 21.868,10.636 SW1.10 22.588,11.128 R38.1
NetR40_2: R40.2 R41.1 SW0.1 | length 5
  Bottom Layer w0.254: R41.1 9.824,-28.067 SW0.1@9.95,-27.941 ; R40.2 SW0.1@9.95,-27.941 ; SW0.1 SW0.1@9.95,-27.941
NetR41_2: R41.2 R42.1 SW0.2 | length 6.4
  Bottom Layer w0.254: R42.1 5.433,-24.741 SW0.2 5.981,-25.289 R41.2
NetR42_2: R42.2 R43.1 SW0.3 | length 5.9
  Bottom Layer w0.254: R43.1 2.94,-20.581 SW0.3 2.54,-21.209 R42.2
NetR43_2: R43.2 R44.1 SW0.4 | length 5.6
  Bottom Layer w0.254: R43.2 1.416,-17.157 SW0.4 2.286,-14.523 R44.1
NetR44_2: R44.2 R45.1 SW0.5 | length 6.1
  Bottom Layer w0.254: R44.2 5.109,-11.569 SW0.5 6.01,-10.668 R45.1
NetR45_2: R45.2 R46.1 SW0.6 | length 5.1
  Bottom Layer w0.254: R45.2 9.513,-9.06 SW0.6 11.715,-6.858 R46.1
NetR46_2: R46.2 R47.1 SW0.7 | length 5
  Bottom Layer w0.254: R46.2 15.053,-8.334 SW0.7 15.494,-8.255 R47.1
NetR47_2: R47.2 R48.2 SW0.8 | length 5.3
  Bottom Layer w0.254: R47.2 19.407,-10.431 SW0.8 21.422,-12.446 R48.2
NetR48_1: R48.1 R49.2 SW0.9 | length 6.4
  Bottom Layer w0.254: R48.1 22.486,-13.196 SW0.9 22.486,-15.628 R49.2
NetR49_1: R49.1 R50.2 SW0.10 | length 6.1
  Bottom Layer w0.254: R50.2 23.519,-21.614 SW0.10 23.083,-20.581 R49.1
NetRB_1: "RGB LED.4" RB.1 | length 9.5
  Top Layer w0.254: v1(41.154,-6.732) 41.154,-5.708 41.188,-5.673
  Bottom Layer w0.254: RB.1@34.258,-10.324 37.702,-6.88 41.154,-6.88 v1(41.154,-6.732)
NetRG_1: "RGB LED.3" RG.1 | length 16.5
  Top Layer w0.254: v1(33.961,-13.128) 33.961,-12.866 39.094,-7.733 41.928,-7.733 43.988,-5.673
  Bottom Layer w0.254: RG.1 32.567,-14.494 33.933,-13.128 v1(33.961,-13.128)
"NetRGB LED_1": "RGB LED.1" RR.2 | length 10.8
  Top Layer w0.254: v1(37.742,-7.874) 37.981,-7.635 37.981,-6.826 40.584,-4.223 41.188,-4.223
  Bottom Layer w0.254: RR.2 34.214,-11.427 37.766,-7.874 v1(37.742,-7.874)
RESET: R59.2 U1.7 X1.P$5 | length 25.2
  Top Layer w0.254: v1(30.144,-0.526) 30.637,-0.033 33.749,-0.033 39.261,5.479 46.736,5.479 46.972,5.715 48.006,5.715 ; X1.P$5 48.006,5.715 ; R59.2 48.006,6.235 48.006,5.715
  Bottom Layer w0.254: U1.7 29.269,-1.401 v1(30.144,-0.526)
RGB_BLUE: N12.1 U1.43 | length 6.2
  Bottom Layer w0.254: N12.1@29.333,-10.843 30.206,-9.969 30.206,-9.646 32.008,-7.844 U1.43
RGB_GREEN: N11.1 U1.41 | length 15.2
  Top Layer w0.254: v1(27.828,-18.158) 28.603,-17.383 28.603,-13.938 29.263,-13.278 29.263,-11.455 31.894,-8.824 v1(32.932,-8.824)
  Bottom Layer w0.254: N11.1 v1(27.828,-18.158) ; v1(32.932,-8.824) 32.932,-7.203 33.008,-7.128 U1.41
RGB_RED: N10.1 U1.42 | length 12.7
  Bottom Layer w0.254: N10.1@29.552,-16.226 29.552,-16.539 30.161,-16.539 31.364,-15.337 31.364,-9.818 32.012,-9.17 32.012,-8.663 32.508,-8.166 U1.42
SWCLK: U1.37 X1.P$1 | length 13.4
  Bottom Layer w0.254: U1.37 38.539,-5.751 38.887,-6.099 47.495,-6.099 X1.P$1
SWDIO: U1.34 X1.P$3 | length 12.8
  Bottom Layer w0.254: U1.34 40.785,-3.401 41.285,-2.901 43.327,-2.901 45.72,-0.508 X1.P$3
TC_LED: N3.1 U1.30 | length 61.6
  Top Layer w0.254: v1(-1.524,16.637) -1.524,14.224 -1.016,13.716 v1(4.826,13.716) ; v1(23.521,-2.811) 29.828,-2.811 v1(29.972,-2.667)
  Bottom Layer w0.254: N3.1 -0.442,26.223 0.508,25.273 0.508,23.638 -1.524,21.606 v1(-1.524,16.637) ; v1(4.826,13.716) 5.08,13.716 9.347,9.449 13.785,9.449 22.352,0.882 22.352,-1.642 v1(23.521,-2.811) ; v1(29.972,-2.667) 33.147,-2.667 34.413,-1.401 U1.30
TC_VAL: SW2.COMMON U1.17 | length 62.4
  Top Layer w0.254: SW2.COMMON -14.13,18.225 -2.647,6.743 0.623,6.743 2.434,4.932 4.627,4.932 8.96,0.599 v1(30.353,0.599)
  Bottom Layer w0.254: v1(30.353,0.599) 31.381,0.599 31.357,0.623 31.508,0.774 U1.17
pads on no net: 1.P$3 1.P$4 U1.1 U1.2 U1.3 U1.4 U1.5 U1.6 U1.12 U1.18 U1.20 U1.21 U1.22 U1.25 U1.26 U1.27 U1.28 U1.31 U1.38 U1.39 U1.40 U1.46

## Polygon pours and split planes (outlines as drawn)
GND on Top Layer "GND_L01_P006" (solid, remove dead copper, pour order 6): -39.112,29.234 52.011,29.234 52.011,-32.766 49.74,-32.766 -38.983,-32.766
no net on Top Layer "Top Layer-No Net" (solid, pour order 4): -46.199,33.584
GND on Bottom Layer "GND_L02_P008" (solid, remove dead copper, pour order 8): -49.613,38.759 56.123,38.759 56.123,-38.633 55.993,-38.502 -49.453,-38.502

## Keep-outs
Keep-Out Layer:
  the board outline again, w0.02